# Altium PCB SLT_4U_V100.PcbDoc (part 4 of 6)
Units mm, origin at the board's own origin, x right, y up, seen from the top; angles counter-clockwise.
Board outline 180 x 80 mm, 5 copper layers (Top Layer, Mid-Layer 1, Mid-Layer 2, Mid-Layer 4, Bottom Layer); 1167 components, 840 nets, 3922 pads, 254 vias.
Unrouted connection lines stored in the file: 1943.
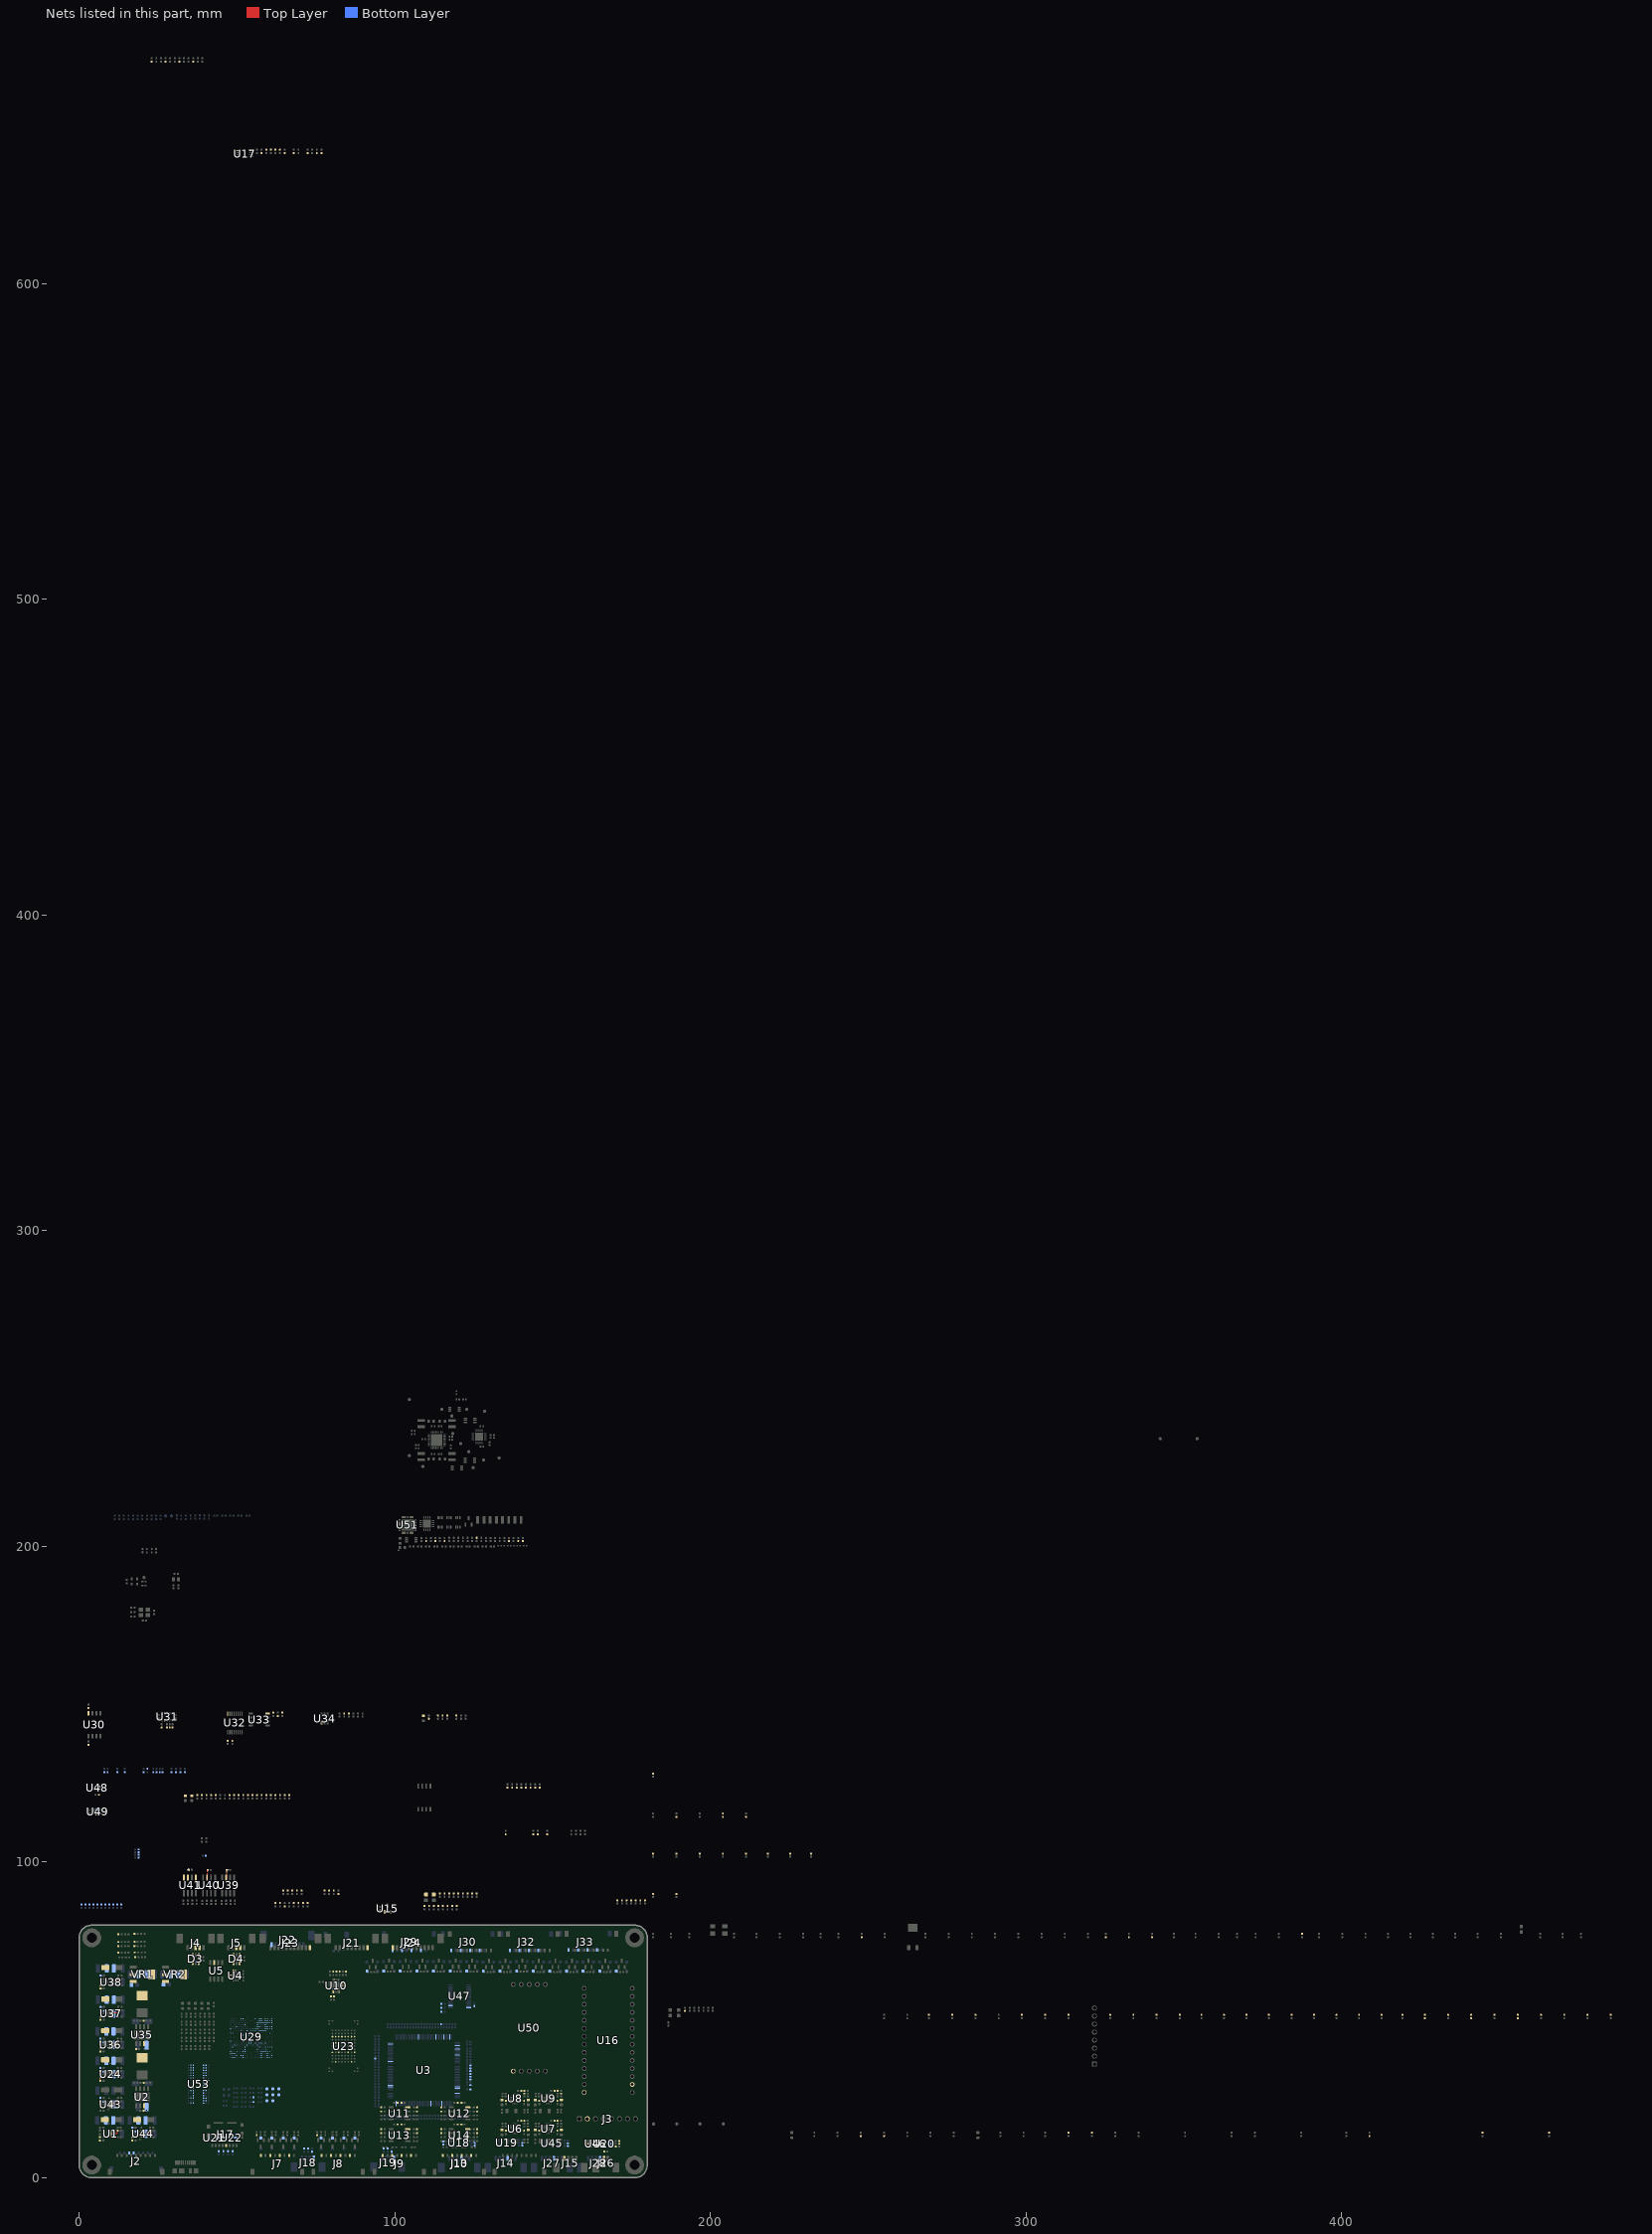
[diagram p4: the nets of this part, all layers, seen from the top]

## Via types
v1: diameter 0.4, hole 0.2, Top Layer to Bottom Layer, 235 vias
v2: diameter 0.4, hole 0.2, Top Layer to Bottom Layer, tented both sides, 18 vias
v3: diameter 0.35, hole 0.15, Top Layer to Bottom Layer, 1 vias

## Nets (pads, with @x,y where several pads share a name; then routed paths per layer and width w, separated by ;. In a path a pad name is that pad's centre, name@x,y a point inside that pad or via, vN(x,y) a via of type N, cw(c..) or ccw(c..) an arc to the next point about the centre after c; other vN are vias at no path point) (continued)
3.3V_MCU: C11.2 C12.2 C21.1 C23.2 C24.2 C25.2 C26.2 C27.2 C28.2 C29.2 C30.2 C31.2 C40.2 C41.2 C42.2 C57.2 C58.2 C79.2 C80.2 C87.2 C90.2 C92.2 C96.2 C99.2 C102.2 C104.2 C108.2 C111.2 C114.2 C117.2 C119.2 C120.2 C121.2 C122.2 C123.2 C141.2 C153.2 C155.2 C156.2 C157.1 C160.2 C184.1 C185.1 C204.2 C205.2 C206.2 C207.2 C208.2 C209.2 C210.2 C211.2 C212.2 DS2.2 J3.2 J9.1 J9.3 J9.5 J9.7 J10.1 J10.3 J10.5 J10.7 J13.3 J14.3 J15.1 J19.1 J27.3 J28.3 R61.2 R111.1 R120.2 R121.2 R124.1 R125.1 R134.1 R135.1 R141.1 R144.2 R145.2 R148.1 R192.1 R197.1 R198.1 R205.1 R206.1 R207.1 R208.1 R215.1 R216.1 R218.1 R219.1 R220.1 R221.1 R246.2 R247.2 R269.1 R270.1 R271.1 R272.1 R285.1 R288.2 R289.1 R290.1 R291.1 R292.1 R293.1 R294.1 R296.1 R347.1 R396.2 R397.2 R398.2 R399.2 R400.2 R401.1 R403.2 R404.2 R405.2 R406.2 R407.2 R463.1 R464.1 R482.1 R483.1 R484.1 R489.1 R490.1 U3.5 U3.9 U3.30 U3.43 U3.72 U3.80 U3.96 U3.134 U3.143 U4.4 U5.7 U6.14 U7.14 U8.14 U9.14 U10.26 U11.8 U12.8 U13.8 U14.8 U15.1 U17.1 U18.1 U18.8 U19.1 U19.8 U20.1 U20.8 U30.8 U31.2 U32.16 U33.8 U34.1 U41.3 U45.8 U46.1 U46.8 U47.2 U47.24 U48.1 U48.10 U49.5 U49.8 VR1.2 VR1.4
3.3V_SOM: C124.2 C125.2 C126.2 C127.2 C140.2 C148.2 C149.2 C178.1 C179.1 C181.1 C182.1 DS4.2 J17.P4 J18.1 R226.2 R227.2 R228.2 R229.2 R230.2 R231.2 R232.2 R244.2 R245.2 R273.1 R274.1 R275.1 R276.1 R287.2 U21.5 U22.5 U39.3 U40.3 VR2.2 VR2.4 | length 6.7
  Top Layer w0.254: U40.3@40.513,95.053 40.644,95.184 40.644,96.661 v1(40.672,96.689) 40.672,97.459 C182.1@40.717,97.504 ; U39.3@46.609,95.053 46.74,95.184 46.74,96.661 v1(46.768,96.689) 46.768,97.459 C179.1@46.813,97.504
  Bottom Layer w0.254: v1(40.672,96.689) 40.694,96.711 40.694,97.481 C181.1@40.717,97.504 ; v1@46.779,96.7 46.801,96.722 46.801,97.492 C178.1@46.824,97.515
3V3_SOM: C130.2 C131.2 C132.2 C133.2 C134.2 C135.2 C136.2 C137.2 C138.2 C139.2 R233.2 R234.2 R235.2 R236.2 R237.2 R238.2 R239.2 R240.2 R241.2 R242.2 R243.2 U23.F2@80.264,44.688 U23.F3@81.264,44.688 U23.F4@82.264,44.688 U23.F5@83.264,44.688 U23.F6@84.264,44.688 U23.F7@85.264,44.688 U23.F8@86.264,44.688 U23.F9@87.264,44.688 U23.H3@81.264,42.688 U23.H8@86.264,42.688 U23.L2@80.264,39.688 U23.L4@82.264,39.688 U23.L7@85.264,39.688 U23.L9@87.264,39.688 U23.P3@81.264,36.688 U23.P8@86.264,36.688
5/12V_Solenoid: C173.2 C174.2 D17.1 D20.1 D21.1 D22.1 D23.1 D24.1 D25.1 D26.1 D27.1 D28.1 D29.1 D30.1 D31.1 D32.1 D33.1 D34.1 D35.1 DS8.2 J29.1 J29.3 J29.5 J29.7 J30.1 J30.3 J30.5 J30.7 J32.1 J32.3 J32.5 J32.7 J33.1 J33.3 J33.5 J33.7 JP9.2 R434.2 R435.2 U38.6
5V_HD4: C115.2 C116.2 C118.2 C168.2 C169.2 C214.2 D16.1 DS7.2 JP6.2 R193.1 R195.1 R199.1 R200.1 R426.2 R427.2 U16.2 U16.28 U17.8 U37.6 U50.1
5V_MAIN: C281.1 C287.1 C289.1 C291.1 C293.1 C294.1 R346.1 U51.4 U51.10 U51.15 U51.20 U51.26 U51.31
5V_MCU: C10.1 C13.2 C14.2 C144.2 C187.2 DS1.2 JP3.1 L1.2 R7.2 R128.1 R210.1 R248.1 R249.2 R257.1 R260.1 R263.1 R266.1 R411.1 R416.1 R424.1 R432.1 U24.5 VR1.3
5V_PERI: C161.2 C162.2 C165.2 C170.2 C188.2 C189.2 DS5.2 JP5.1 JP6.1 JP8.1 L6.2 R412.2 R417.2 R425.2 U36.5 U37.5
5V_SOM: C142.2 C143.2 C147.1 D13.1 DS3.2 J24.11 JP2.1 JP3.2 R250.2 R251.2 U24.6 VR2.3 | length 1
  Top Layer w0.254: R251.2@6.714,30.734 R250.2@6.714,31.75
  other v1: 9.779,36.068
5V_TEC: C47.2 C48.2 C49.2 C50.2 C51.2 C52.2 C53.2 C54.2 C69.2 C70.2 C71.2 C72.2 C73.2 C74.2 C75.2 C76.2 C163.2 C164.2 D15.1 DS6.2 JP5.2 R418.2 R419.2 U6.4 U6.11 U7.4 U7.11 U8.4 U8.11 U9.4 U9.11 U36.6
12V_HEATER: C198.2 C199.2 D19.1 DS10.2 JP11.2 R212.2 R214.2 U44.6
+3.3V_SOM: R488.2 R506.2 R508.2
+5V_SOM: R533.1
+VDDCORE: C22.1 C32.2 C33.2 C34.2 C35.2 C36.2 C37.2 C38.2 C39.2 U3.3 U3.29 U3.33 U3.50 U3.81 U3.107 U3.123 U3.139
_PA0: R355.2 U29.H17
_PA1: R357.2 U29.G20
_PA2: R360.2 U29.L13
_PA3: R363.2 U29.L14
_PA4: R365.2 U29.K13
_PA5: R368.2 U29.C21
_PA6: R371.2 U29.K14
_PA7: R373.2 U29.H16
_PA8: R375.2 U29.B21
_PA9: R377.2 U29.D20
_PA10: R379.2 U29.J15
_PA11: R381.2 U29.F20
_PA12: R488.1 R505.2 U29.V14
_PA13: R506.1 R507.2 U29.AA16
_PA14: R508.1 R509.2 U29.AA20
_PA17: R387.2 U29.V16
_PA18: R388.2 U29.Y16
_PA20: R389.2 U29.Y21
_PA22: R392.2 U29.Y18
_PA26: R395.2 U29.W16
_PA27: R456.2 U29.W18
_PA28: R457.2 U29.T14
_PA29: R458.2 U29.W19
_PA30: U29.R14
_PA31: R486.2 U29.W20
_PB0: R356.2 U29.U18
_PB1: R358.2 U29.W21
_PB2: R361.2 U29.T21
_PB4: R366.2 U29.T20
_PB5: R369.2 U29.V18
_PB6: R372.2 U29.T19
_PB7: R374.2 U29.V17
_PB8: R376.2 U29.T18
_PB9: R378.2 U29.P17
_PB10: R380.2 U29.P15
_PB11: R382.2 U29.G21
_PB12: R383.2 U29.M15
_PB13: R384.2 U29.R16
_PB14: R385.2 U29.N14
_PB28: U29.G10
_PB29: R459.2 U29.H11
_PB30: R485.2 U29.B9
_PB31: R487.2 U29.A13
_PC0: R510.2 U29.A9
_PC1: R511.2 U29.H10
_PC2: R512.2 U29.A7
_PC3: R390.1 R391.2 U29.G1
_PC4: R393.1 R394.2 R513.2 U29.H5
_PC5: R460.1 R461.2 U29.F2
_PC7: J2.6 U29.J8
_PC8: J2.5 U29.F1
_PC9: R514.2 U29.G2
_PC10: R515.2 U29.M10
_PC11: R516.2 U29.K9
_PC12: R518.2 U29.D1
_PC13: R520.2 U29.F8
_PC14: R522.2 U29.D6
_PC15: R524.2 U29.H9
_PD12: R517.2 U29.P12
_PD13: R519.2 U29.H18
_PD14: R521.2 U29.C19
_PD15: R523.2 U29.R12
_PD16: R525.2 U29.D18
_PD17: R527.2 U29.G18
_PD18: R528.2 U29.B19
_PD19: R529.2 U29.N11
_PD22: U29.A19
_PD23: U29.K12
_PD25: U29.K10
_PD28: R530.2 U29.J12
_PE2: R359.2 U29.A18
_PE3: R362.2 U29.C15
_PE4: R364.2 U29.D15
_PE5: R367.2 U29.B16
_PE6: R370.2 U29.G13
ADC_SWITCH: R79.1 U10.14 U10.15 U10.16 U10.17 U10.18 U10.19 U10.20 U10.21
ADC_TEMP1: C94.2 R143.2 R168.2
ADC_TEMP2: C98.2 R150.2 R174.2
ADC_TEMP3: C106.2 R73.1 R180.2
ADC_TEMP4: C110.2 R75.1 R186.2
ADC_TEMP5: C95.2 R89.2 R169.2
ADC_TEMP6: C101.2 R84.2 R175.2
ADC_TEMP7: C107.2 R77.1 R181.2
ADC_TEMP8: C113.2 R106.2 R187.2
BMP390_INT: R14.1 R290.2 U48.7
CANRX1: R82.2 U41.4
CANTX1: R87.2 U41.1
CONN_USB_1_N: D3.1 U4.14
CONN_USB_1_P: D3.3 U4.13
CONN_USB_1_R_N: D3.6 J4.3
CONN_USB_1_R_P: D3.4 J4.2
CONN_USB_2_N: D4.1 U4.12
CONN_USB_2_P: D4.3 U4.11
CONN_USB_2_R_N: D4.6 J5.3
CONN_USB_2_R_P: D4.4 J5.2
DDR_A0: U29.W6 U53.N3
DDR_A1: U29.P6 U53.P7
DDR_A2: U29.V5 U53.P3
DDR_A3: U29.V6 U53.N2
DDR_A4: U29.R6 U53.P8
DDR_A5: U29.W4 U53.P2
DDR_A6: U29.P7 U53.R8
DDR_A7: U29.W2 U53.R2
DDR_A8: U29.L8 U53.T8
DDR_A9: U29.V4 U53.R3
DDR_A10: U29.T3 U53.L7
DDR_A11: U29.M9 U53.R7
DDR_A12: U29.P5 U53.N7
DDR_A13: U29.V2 U53.T3
DDR_A14: U29.L9 U53.T7
DDR_A15: U29.R4 U53.M7
DDR_BA0: U29.V8 U53.M2
DDR_BA1: U29.P4 U53.N8
DDR_BA2: U29.R8 U53.M3
DDR_CAS: U29.T8 U53.K3
DDR_CK_N: TP20.0 U29.T4 U53.K7
DDR_CK_P: TP19.0 U29.U4 U53.J7
DDR_CKE: U29.V3 U53.K9
DDR_CS: U29.V7 U53.L2
DDR_D0: TP17.0 U29.N2 U53.E3
DDR_D1: U29.M7 U53.F7
DDR_D2: U29.R3 U53.F2
DDR_D3: U29.M8 U53.F8
DDR_D4: U29.T2 U53.H3
DDR_D5: U29.N8 U53.H8
DDR_D6: U29.T1 U53.G2
DDR_D7: U29.N7 U53.H7
DDR_D8: TP18.0 U29.Y7 U53.D7
DDR_D9: U29.AA4 U53.C3
DDR_D10: U29.Y9 U53.C8
DDR_D11: U29.Y3 U53.C2
DDR_D12: U29.AA7 U53.A7
DDR_D13: U29.AA3 U53.A2
DDR_D14: U29.W7 U53.B8
DDR_D15: U29.W3 U53.A3
DDR_DQM0: U29.N1 U53.E7
DDR_DQM1: U29.Y4 U53.D3
DDR_DQS0_N: TP22.0 U29.R2 U53.G3
DDR_DQS0_P: TP21.0 U29.R1 U53.F3
DDR_DQS1_N: TP24.0 U29.AA6 U53.B7
DDR_DQS1_P: TP23.0 U29.Y6 U53.C7
DDR_ODT: U29.W1 U53.K1
DDR_RAS: U29.U8 U53.J3
DDR_RESET: R540.2 U29.V1 U53.T2
DDR_VREF: C321.1 C329.2 C337.1 C341.1 C342.1 R542.2 R543.1 U29.Y1 U53.H1 U53.M8
DDR_WE: U29.N10 U53.L3
DDR_ZQ: R541.2 U29.AA2
eFUSE_ILIM_5/12V_Solenoid: R151.2 R439.2 U38.9 | length 2
  Top Layer w0.254: U38.9@11.052,62.192 12.126,62.192 ccw(c12.126,62.446) 12.38,62.432 12.403,62.842 R439.2@12.412,62.992
eFUSE_ILIM_5V_HD4: R431.2 U10.7 U37.9 | length 2
  Top Layer w0.254: U37.9@11.037,52.262 12.111,52.262 ccw(c12.111,52.516) 12.365,52.501 12.388,52.912 R431.2@12.397,53.062
eFUSE_ILIM_5V_SOM: R255.2 R282.1 R283.1 U24.9 | length 2
  Top Layer w0.254: U24.9@10.953,32.99 12.027,32.99 ccw(c12.027,33.244) 12.281,33.23 12.305,33.64 R255.2@12.313,33.79
eFUSE_ILIM_5V_TEC: R423.2 U10.6 U36.9 | length 2
  Top Layer w0.254: U36.9@10.953,42.261 12.027,42.261 ccw(c12.027,42.515) 12.281,42.501 12.305,42.911 R423.2@12.313,43.061
eFUSE_ILIM_12V_HEATER: R341.2 U10.9 U44.9 | length 2
  Top Layer w0.254: U44.9@21.116,14.067 22.19,14.067 ccw(c22.19,14.321) 22.444,14.307 22.468,14.717 R341.2@22.476,14.867
eFUSE_ILIM_12V_LP: R209.2 U10.8 U43.9 | length 2
  Top Layer w0.254: U43.9@10.95,23.465 12.024,23.465 ccw(c12.024,23.719) 12.278,23.705 12.302,24.115 R209.2@12.31,24.265
eFUSE_ILIM_IF_12V: R6.2 R281.1 U1.9 | length 2
  Top Layer w0.254: U1.9@10.826,14.067 11.888,14.067 ccw(c11.888,14.321) 12.068,14.141 12.112,14.186 ccw(c11.932,14.365) 12.186,14.365 R6.2@12.186,14.867
EXP_12V: C1.2 C2.2 C8.2 C9.2 C88.2 C89.2 C159.2 C194.2 C195.2 C200.2 C201.2 D1.1 D5.1 D6.1 D7.1 D8.1 D9.1 D10.1 D11.1 D12.1 J7.1 J7.3 J7.5 J7.7 J8.1 J8.3 J8.5 J8.7 J21.1 J22.1 J23.1 JP1.2 JP7.1 JP10.1 JP11.1 R2.2 R3.2 R129.2 R211.2 U1.6 U2.7 U35.7 U43.5 U44.5
  other v1: 19.434,12.065 19.434,12.065 19.688,15.875 19.688,15.875 9.652,17.145 21.336,21.336 9.268,21.463 9.522,25.273